# Altium PCB S52多功能板.PcbDoc (part 2 of 5)
Units mm, origin at the board's own origin, x right, y up, seen from the top; angles counter-clockwise.
Board outline 152.4 x 101.6 mm, 2 copper layers (Top Layer, Bottom Layer); 136 components, 143 nets, 561 pads, 46 vias.
Unrouted connection lines stored in the file: 1.
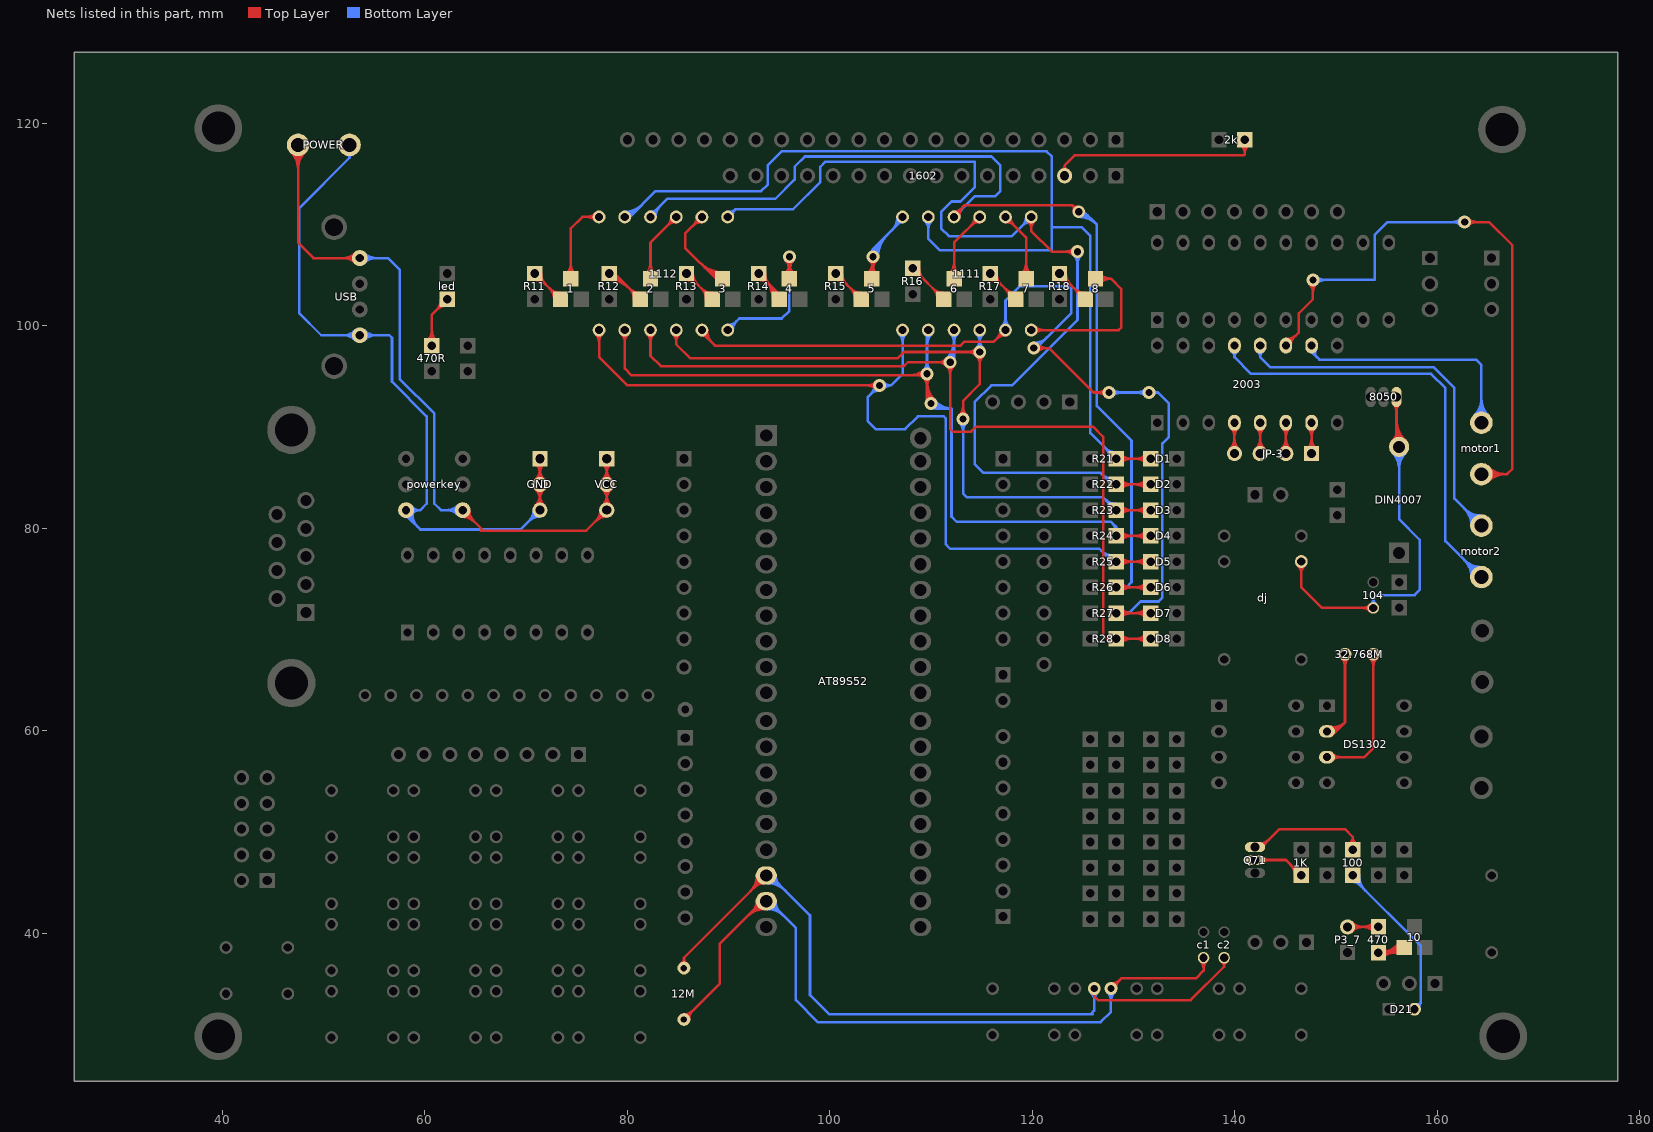
[diagram p2: the nets of this part, all layers, seen from the top]

## Via types
v1: diameter 1.27, hole 0.711, Top Layer to Bottom Layer, 46 vias

## Nets (pads, with @x,y where several pads share a name; then routed paths per layer and width w, separated by ;. In a path a pad name is that pad's centre, name@x,y a point inside that pad or via, vN(x,y) a via of type N, cw(c..) or ccw(c..) an arc to the next point about the centre after c; other vN are vias at no path point) (continued)
Net1_b: 1.B R11.2 | length 11.3
  Top Layer w0.254: R11.2@70.866,104.521 cw(c70.866,102.988) 71.95,104.072 cw(c73.034,105.156) R11.2@71.501,105.156 ; R11.2@70.866,104.775 cw(c70.866,103.855) 71.516,104.506 cw(c72.167,105.156) R11.2@71.247,105.156 ; R11.2@70.866,105.156 1.B@73.406,102.616 ; 1.B@72.771,102.616 ccw(c71.238,102.616) 72.322,103.7 ccw(c73.406,104.784) 1.B@73.406,103.251 ; 1.B@73.025,102.616 ccw(c72.105,102.616) 72.756,103.266 ccw(c73.406,103.917) 1.B@73.406,102.997
Net1_c: 1.C 1112.12 | length 14
  Top Layer w0.254: 1.C@73.973,105.097 ccw(c72.889,106.181) 74.422,106.181 ccw(c75.955,106.181) 1.C@74.871,105.097 ; 1.C@74.153,104.917 ccw(c73.502,105.568) 74.422,105.568 ccw(c75.342,105.568) 1.C@74.691,104.917 ; 1.C@74.422,104.648 74.422,109.601 75.565,110.744 1112.12@77.216,110.744 ; 1112.12@76.857,110.385 ccw(c75.99,109.518) 75.99,110.744 ccw(c75.99,111.97) 1112.12@76.857,111.103
Net1K_2: 1K.2 Q71.2 | length 10.5
  Top Layer w0.254: Q71.2@141.986,47.244 145.034,47.244 1K.2@146.558,45.72 ; Q71.2@142.75,46.98 cw(c143.386,46.344) 143.386,47.244 cw(c143.386,48.144) Q71.2@142.75,47.508 ; 1K.2@145.923,45.72 ccw(c144.39,45.72) 145.474,46.804 ccw(c146.558,47.888) 1K.2@146.558,46.355 ; 1K.2@146.177,45.72 ccw(c145.257,45.72) 145.908,46.37 ccw(c146.558,47.021) 1K.2@146.558,46.101
Net2_b: 2.B R12.2 | length 13
  Top Layer w0.254: R12.2@78.232,104.521 cw(c78.232,101.762) 80.183,103.713 ; R12.2@78.232,104.775 cw(c78.232,102.629) 79.75,104.146 ; R12.2@78.232,105.029 cw(c78.232,103.496) 79.316,104.58 ; R12.2@78.232,105.156 78.74,105.156 2.B@81.28,102.616 ; 2.B@80.645,102.616 ccw(c79.112,102.616) 80.196,103.7 ccw(c81.28,104.784) 2.B@81.28,103.251 ; 2.B@80.899,102.616 ccw(c79.979,102.616) 80.63,103.266 ccw(c81.28,103.917) 2.B@81.28,102.997
Net2_c: 2.C 1112.9 | length 12.9
  Top Layer w0.254: 2.C@81.847,105.097 ccw(c80.763,106.181) 82.296,106.181 ccw(c83.829,106.181) 2.C@82.745,105.097 ; 2.C@82.027,104.917 ccw(c81.376,105.568) 82.296,105.568 ccw(c83.216,105.568) 2.C@82.565,104.917 ; 2.C@82.296,104.648 82.296,108.204 1112.9@84.836,110.744 ; 1112.9@84.328,110.744 cw(c83.102,110.744) 83.969,109.877 cw(c84.836,109.01) 1112.9@84.836,110.236
Net2k_2: 2k.2 1602.3 | length 25.2
  Top Layer w0.254: 1602.3@122.907,115.363 ccw(c122.673,115.824) 123.19,115.824 ; 1602.3@123.19,114.808 123.19,115.824 ; 1602.3@123.473,115.363 cw(c123.707,115.824) 123.19,115.824 ; 2k.2@140.552,117.886 cw(c139.751,116.967) 140.97,116.967 ; 2k.2@140.719,118.077 cw(c140.239,117.526) 140.97,117.526 cw(c141.701,117.526) 2k.2@141.221,118.077 ; 2k.2@140.97,118.364 140.97,116.967 ; 2k.2@141.388,117.886 ccw(c142.189,116.967) 140.97,116.967 ; 123.19,115.824 124.206,116.84 140.917,116.84 140.97,116.967
Net3_b: 3.B R13.2 | length 11.3
  Top Layer w0.254: R13.2@85.852,104.521 cw(c85.852,102.988) 86.936,104.072 cw(c88.02,105.156) R13.2@86.487,105.156 ; R13.2@85.852,104.775 cw(c85.852,103.855) 86.502,104.506 cw(c87.153,105.156) R13.2@86.233,105.156 ; R13.2@85.852,105.156 3.B@88.392,102.616 ; 3.B@87.757,102.616 ccw(c86.224,102.616) 87.308,103.7 ccw(c88.392,104.784) 3.B@88.392,103.251 ; 3.B@88.011,102.616 ccw(c87.091,102.616) 87.742,103.266 ccw(c88.392,103.917) 3.B@88.392,102.997
Net3_c: 3.C 1112.8 | length 17.3
  Top Layer w0.254: 1112.8@86.868,110.744 cw(c85.642,110.744) 86.509,109.877 cw(c87.376,109.01) 1112.8@87.376,110.236 ; 87.24,106.181 ccw(c89.408,108.349) 3.C@89.408,105.283 ; 1112.8@87.376,110.744 85.725,109.093 85.725,107.696 88.773,104.648 3.C@89.408,104.648 ; 87.674,105.747 ccw(c89.408,107.482) 3.C@89.408,105.029 ; 88.107,105.314 ccw(c89.408,106.615) 3.C@89.408,104.775 ; 88.541,104.88 ccw(c89.408,105.747) 3.C@89.408,104.521
Net4_b: 4.B R14.2 | length 12.8
  Top Layer w0.254: R14.2@92.964,104.521 cw(c92.964,102.988) 94.048,104.072 cw(c95.132,105.156) R14.2@93.599,105.156 ; R14.2@92.964,104.648 R14.2@92.964,105.156 94.996,103.124 4.B@94.996,102.616 ; R14.2@92.964,104.775 cw(c92.964,103.855) 93.614,104.506 cw(c94.265,105.156) R14.2@93.345,105.156 ; R14.2@93.553,104.567 cw(c91.602,102.616) 4.B@94.361,102.616 ; 93.986,104.134 cw(c92.469,102.616) 4.B@94.615,102.616 ; 94.42,103.7 cw(c93.336,102.616) 4.B@94.869,102.616
Net4_c: 4.C 1112.6 | length 24
  Top Layer w0.254: 4.C@95.563,105.097 ccw(c94.479,106.181) 96.012,106.181 ccw(c97.545,106.181) 4.C@96.461,105.097 ; v1@95.653,106.448 cw(c94.786,105.581) 96.012,105.581 cw(c97.238,105.581) v1@96.371,106.448 ; 4.C@95.743,104.917 ccw(c95.092,105.568) 96.012,105.568 ccw(c96.932,105.568) 4.C@96.281,104.917 ; 4.C@96.012,104.648 v1(96.012,106.807)
  Bottom Layer w0.254: 1112.6@89.916,99.568 91.059,100.711 95.25,100.711 96.012,101.473 v1(96.012,106.807) ; 1112.6@89.916,100.076 ccw(c89.916,101.302) 90.783,100.435 ccw(c91.65,99.568) 1112.6@90.424,99.568 ; v1@95.653,106.448 cw(c94.786,105.581) 96.012,105.581 cw(c97.238,105.581) v1@96.371,106.448
Net5_b: 5.B R15.2 | length 11.3
  Top Layer w0.254: R15.2@100.584,104.521 cw(c100.584,102.988) 101.668,104.072 cw(c102.752,105.156) R15.2@101.219,105.156 ; R15.2@100.584,104.775 cw(c100.584,103.855) 101.234,104.506 cw(c101.885,105.156) R15.2@100.965,105.156 ; R15.2@100.584,105.156 5.B@103.124,102.616 ; 5.B@102.489,102.616 ccw(c100.956,102.616) 102.04,103.7 ccw(c103.124,104.784) 5.B@103.124,103.251 ; 5.B@102.743,102.616 ccw(c101.823,102.616) 102.474,103.266 ccw(c103.124,103.917) 5.B@103.124,102.997
Net5_c: 5.C 1111.12 | length 23
  Top Layer w0.254: 5.C@103.691,105.097 ccw(c102.3,106.488) v1@104.267,106.488 ; 5.C@103.871,104.917 ccw(c102.914,105.874) 104.267,105.874 ccw(c105.366,105.874) 5.C@104.589,105.097 ; v1@103.908,106.448 cw(c103.041,105.581) 104.267,105.581 cw(c105.493,105.581) v1@104.626,106.448 ; 5.C@104.267,104.775 v1(104.267,106.807)
  Bottom Layer w0.254: v1@104.013,106.807 cw(c105.239,106.807) 104.372,107.674 ; v1@104.072,107.276 ccw(c103.95,107.569) 104.267,107.569 ; v1@104.462,107.276 cw(c104.584,107.569) 104.267,107.569 ; v1@104.521,106.807 cw(c106.974,106.807) 105.239,108.541 ; v1@104.775,106.807 cw(c107.841,106.807) 105.673,108.975 ; 104.806,108.108 ccw(c106.107,106.807) v1(104.267,106.807) 104.267,107.569 ; 106.141,109.443 ccw(c104.84,110.744) 1111.12@106.68,110.744 ; 106.575,109.877 ccw(c105.708,110.744) 1111.12@106.934,110.744 ; 106.754,110.056 cw(c107.188,109.623) 1111.12@107.188,110.236 ; 1111.12@107.188,110.744 107.188,110.49 104.267,107.569
Net6_b: 6.B R16.2 | length 12
  Top Layer w0.254: R16.2@108.204,105.029 cw(c108.204,103.496) 109.288,104.58 cw(c110.372,105.664) R16.2@108.839,105.664 ; R16.2@108.204,105.283 cw(c108.204,104.363) 108.854,105.014 cw(c109.505,105.664) R16.2@108.585,105.664 ; R16.2@108.204,105.664 6.B@111.252,102.616 ; 6.B@110.617,102.616 ccw(c109.084,102.616) 110.168,103.7 ccw(c111.252,104.784) 6.B@111.252,103.251 ; 6.B@110.871,102.616 ccw(c109.951,102.616) 110.602,103.266 ccw(c111.252,103.917) 6.B@111.252,102.997
Net6_c: 6.C 1111.9 | length 12.9
  Top Layer w0.254: 6.C@111.819,105.097 ccw(c110.735,106.181) 112.268,106.181 ccw(c113.801,106.181) 6.C@112.717,105.097 ; 6.C@111.999,104.917 ccw(c111.348,105.568) 112.268,105.568 ccw(c113.188,105.568) 6.C@112.537,104.917 ; 6.C@112.268,104.648 112.268,108.204 1111.9@114.808,110.744 ; 1111.9@114.3,110.744 cw(c113.074,110.744) 113.941,109.877 cw(c114.808,109.01) 1111.9@114.808,110.236
Net7_b: 7.B R17.2 | length 11.3
  Top Layer w0.254: R17.2@115.824,104.521 cw(c115.824,102.988) 116.908,104.072 cw(c117.992,105.156) R17.2@116.459,105.156 ; R17.2@115.824,104.775 cw(c115.824,103.855) 116.474,104.506 cw(c117.125,105.156) R17.2@116.205,105.156 ; R17.2@115.824,105.156 7.B@118.364,102.616 ; 7.B@117.729,102.616 ccw(c116.196,102.616) 117.28,103.7 ccw(c118.364,104.784) 7.B@118.364,103.251 ; 7.B@117.983,102.616 ccw(c117.063,102.616) 117.714,103.266 ccw(c118.364,103.917) 7.B@118.364,102.997
Net7_c: 7.C 1111.8 | length 12.7
  Top Layer w0.254: 1111.8@117.348,110.236 cw(c117.348,109.01) 118.215,109.877 cw(c119.082,110.744) 1111.8@117.856,110.744 ; 1111.8@117.348,110.744 119.38,108.712 7.C@119.38,104.648 ; 7.C@118.931,105.097 ccw(c117.847,106.181) 119.38,106.181 ccw(c120.913,106.181) 7.C@119.829,105.097 ; 7.C@119.111,104.917 ccw(c118.46,105.568) 119.38,105.568 ccw(c120.3,105.568) 7.C@119.649,104.917
Net8_b: 8.B R18.2 | length 11.3
  Top Layer w0.254: R18.2@122.682,104.521 cw(c122.682,102.988) 123.766,104.072 cw(c124.85,105.156) R18.2@123.317,105.156 ; R18.2@122.682,104.775 cw(c122.682,103.855) 123.332,104.506 cw(c123.983,105.156) R18.2@123.063,105.156 ; R18.2@122.682,105.156 8.B@125.222,102.616 ; 8.B@124.587,102.616 ccw(c123.054,102.616) 124.138,103.7 ccw(c125.222,104.784) 8.B@125.222,103.251 ; 8.B@124.841,102.616 ccw(c123.921,102.616) 124.572,103.266 ccw(c125.222,103.917) 8.B@125.222,102.997
Net8_c: 8.C 1111.6 | length 21.5
  Top Layer w0.254: 1111.6@119.888,99.568 128.524,99.568 128.778,99.822 128.778,103.632 127.762,104.648 ; 1111.6@120.247,99.209 cw(c121.114,98.342) 121.114,99.568 cw(c121.114,100.794) 1111.6@120.247,99.927 ; 8.C@126.238,104.648 127.762,104.648 ; 8.C@126.509,104.38 cw(c127.152,103.741) 127.152,104.648 cw(c127.152,105.555) 8.C@126.509,104.916 ; 8.C@126.689,104.201 cw(c127.762,103.137) 127.762,104.648 ; 8.C@126.689,105.095 ccw(c127.762,106.159) 127.762,104.648
Net10_b: 10.B 470.1 | length 13.4
  Top Layer w0.254: 470.1@154.447,37.831 cw(c155.098,37.18) 155.098,38.1 cw(c155.098,39.02) 470.1@154.447,38.369 ; 470.1@154.627,37.651 cw(c155.711,36.567) 155.711,38.1 cw(c155.711,39.633) 470.1@154.627,38.549 ; 470.1@154.743,38.1 ccw(c154.743,40.358) 10.B@156.433,38.861 ; 155.307,38.1 ccw(c155.307,39.858) 10.B@156.623,38.692 ; 155.871,38.1 ccw(c155.871,39.358) 10.B@156.813,38.524 ; 10.B@156.243,39.029 cw(c154.178,40.858) 470.1@154.178,38.1 156.21,38.1 10.B@156.718,38.608
Net12M_1: 12M.1 AT89S52.19 c1.2 | length 90.4
  Top Layer w0.254: 12M.1@85.598,31.496 89.154,35.052 89.154,38.989 93.345,43.18 AT89S52.19@93.726,43.18 ; 12M.1@85.598,32.004 ccw(c85.598,33.23) 86.465,32.363 ccw(c87.332,31.496) 12M.1@86.106,31.496 ; 91.858,41.693 cw(c93.576,39.975) AT89S52.19@93.576,42.405 ; 92.292,42.127 cw(c93.576,40.842) AT89S52.19@93.576,42.659 ; 92.416,42.251 ccw(c91.486,43.18) AT89S52.19@92.801,43.18 ; 92.725,42.56 cw(c93.576,41.709) AT89S52.19@93.576,42.913 ; v1(127.762,34.544) 128.778,35.56 136.144,35.56 136.906,36.322 c1.2@136.906,37.592 ; v1@127.762,35.052 ccw(c127.762,36.278) 128.629,35.411 ccw(c129.496,34.544) v1@128.27,34.544 ; c1.2@136.592,37.278 cw(c135.833,36.519) 136.906,36.519 cw(c137.979,36.519) c1.2@137.22,37.278
  Bottom Layer w0.254: 12M.1@85.598,31.496 12M.1@85.979,31.496 ; AT89S52.19@93.726,43.18 93.98,43.18 96.647,40.513 96.647,33.401 98.806,31.242 126.746,31.242 127.762,32.258 v1(127.762,34.544) ; AT89S52.19@93.876,42.405 cw(c93.876,40.282) 95.377,41.783 ; AT89S52.19@93.876,42.659 cw(c93.876,41.149) 94.944,42.216 ; AT89S52.19@94.397,43.18 ccw(c95.405,43.18) 94.693,42.467 ; AT89S52.19@94.651,43.18 ccw(c96.272,43.18) 95.126,42.034 ; v1@127.403,34.185 cw(c126.536,33.318) 127.762,33.318 cw(c128.988,33.318) v1@128.121,34.185
Net12M_2: 12M.2 AT89S52.18 c2.2 | length 90.9
  Top Layer w0.254: 12M.2@85.293,36.982 ccw(c84.836,37.592) 85.598,37.592 ; 12M.2@85.598,36.576 85.598,37.592 ; 12M.2@85.903,36.982 cw(c86.36,37.592) 85.598,37.592 ; 92.146,44.14 ccw(c90.566,45.72) AT89S52.18@92.801,45.72 ; 92.508,44.502 cw(c93.576,43.435) AT89S52.18@93.576,44.945 ; 92.58,44.574 ccw(c91.434,45.72) AT89S52.18@93.055,45.72 ; 92.942,44.936 cw(c93.576,44.302) AT89S52.18@93.576,45.199 ; 93.013,45.007 ccw(c92.301,45.72) AT89S52.18@93.309,45.72 ; AT89S52.18@93.726,45.72 85.598,37.592 ; v1(126.111,34.544) 126.111,33.782 ; c2.2@138.671,37.236 cw(c138.271,36.703) 138.938,36.703 ; c2.2@138.938,37.592 138.938,36.703 ; c2.2@139.205,37.236 ccw(c139.605,36.703) 138.938,36.703 ; 126.111,33.782 ccw(c125.794,33.782) 125.916,34.075 cw(c125.794,33.782) 126.111,33.782 ; 126.111,33.782 cw(c126.428,33.782) 126.306,34.075 ccw(c126.428,33.782) 126.111,33.782 ; 126.111,33.782 126.492,33.401 135.636,33.401 138.938,36.703
  Bottom Layer w0.254: AT89S52.18@93.726,45.72 94.107,45.72 98.044,41.783 98.044,33.909 99.949,32.004 125.984,32.004 ; AT89S52.18@93.876,44.945 cw(c93.876,42.515) 95.594,44.233 ; AT89S52.18@93.876,45.199 cw(c93.876,43.382) 95.16,44.667 ; AT89S52.18@93.876,45.453 cw(c93.876,44.249) 94.727,45.1 ; AT89S52.18@94.651,45.72 ccw(c95.966,45.72) 95.036,44.791 ; 125.73,32.004 126.111,32.385 v1(126.111,34.544) ; v1@125.752,34.185 cw(c124.885,33.318) 126.111,33.318 cw(c127.337,33.318) v1@126.47,34.185
Net100_1: 100.1 D21.2 | length 21
  Bottom Layer w0.254: 100.1@151.638,45.085 cw(c151.638,44.165) 152.288,44.816 ; 100.1@151.638,45.72 151.638,45.466 158.369,38.735 158.369,33.147 ; 100.1@152.019,45.72 ccw(c153.552,45.72) 152.468,44.636 ; 100.1@152.273,45.72 ccw(c154.419,45.72) 152.902,44.202 ; D21.2@157.734,32.512 158.369,33.147 ; D21.2@157.857,33.005 ccw(c157.987,33.529) 158.369,33.147 ; D21.2@158.227,32.635 cw(c158.751,32.765) 158.369,33.147
Net100_2: 100.2 Q71.3 | length 15.6
  Top Layer w0.254: Q71.3@141.986,48.514 142.621,48.514 144.399,50.292 150.876,50.292 151.638,49.53 ; Q71.3@142.486,48.633 ccw(c142.486,49.246) 142.92,48.813 ; Q71.3@142.486,48.887 ccw(c142.486,50.113) 143.353,49.246 ; Q71.3@142.859,48.514 cw(c143.434,48.514) 143.027,48.92 ; 100.2@151.257,48.768 ccw(c150.686,49.53) 151.638,49.53 ; 100.2@151.638,48.26 151.638,49.53 ; 100.2@152.019,48.768 cw(c152.59,49.53) 151.638,49.53
Net104_2: 104.2 8050.3 DIN4007.1 dj.6 | length 54.8
  Top Layer w0.254: dj.6@146.199,76.349 cw(c145.332,75.482) 146.558,75.482 cw(c147.784,75.482) dj.6@146.917,76.349 ; dj.6@146.558,76.708 146.558,74.168 148.59,72.136 104.2@153.67,72.136 ; 104.2@153.356,71.822 ccw(c152.597,71.063) 152.597,72.136 ccw(c152.597,73.209) 104.2@153.356,72.45 ; DIN4007.1@155.593,88.651 ccw(c154.716,89.528) 155.956,89.528 ccw(c157.704,89.528) DIN4007.1@156.468,88.292 ; 8050.3@155.692,92.2 cw(c155.056,91.563) 155.956,91.563 cw(c156.856,91.563) 8050.3@156.22,92.2 ; 155.956,90.142 ccw(c158.318,90.142) DIN4007.1@156.648,88.472 ; 155.956,90.755 ccw(c158.931,90.755) DIN4007.1@156.827,88.651 ; 8050.3@155.956,92.964 155.956,88.288 DIN4007.1@156.21,88.034
  Bottom Layer w0.254: 104.2@153.403,72.492 ccw(c153.003,73.025) 153.67,73.025 ; 104.2@153.67,72.136 153.67,73.025 ; 104.2@153.937,72.492 cw(c154.337,73.025) 153.67,73.025 ; DIN4007.1@155.593,87.417 cw(c154.102,85.926) 156.21,85.926 cw(c158.318,85.926) DIN4007.1@156.827,87.417 ; DIN4007.1@155.772,87.596 cw(c154.716,86.54) 156.21,86.54 cw(c157.704,86.54) DIN4007.1@156.648,87.596 ; DIN4007.1@156.21,88.034 156.21,80.899 158.242,78.867 158.242,73.914 157.734,73.406 154.051,73.406 153.67,73.025
Net121_1: 32.768M.1 DS1302.3 | length 18
  Top Layer w0.254: DS1302.3@149.094,57.403 152.78,57.403 153.67,58.293 32.768M.1@153.67,67.564 ; DS1302.3@149.613,57.062 cw(c150.437,56.238) 150.437,57.403 cw(c150.437,58.568) DS1302.3@149.613,57.744 ; 32.768M.1@153.311,67.205 cw(c152.444,66.338) 153.67,66.338 cw(c154.896,66.338) 32.768M.1@154.029,67.205
Net121_2: 32.768M.2 DS1302.2 | length 16.3
  Top Layer w0.254: DS1302.2@149.094,59.943 149.986,59.943 ; DS1302.2@149.207,59.671 ccw(c149.382,60.402) 149.914,59.871 ; DS1302.2@149.266,59.918 ccw(c149.506,60.92) 150.234,60.191 ; DS1302.2@149.325,60.165 ccw(c149.631,61.437) 150.555,60.512 ; DS1302.2@149.385,60.412 ccw(c149.755,61.954) 150.876,60.833 ; DS1302.2@149.72,59.763 cw(c149.986,59.656) 149.986,59.943 ; DS1302.2@149.72,60.123 ccw(c149.986,60.23) 149.986,59.943 ; 32.768M.2@150.517,67.205 cw(c149.65,66.338) 150.876,66.338 cw(c152.102,66.338) 32.768M.2@151.235,67.205 ; 32.768M.2@150.876,67.564 150.876,60.833 ; 149.986,59.943 150.876,60.833
Net211_1: GND.1 GND.2 GND.3 POWER.2 powerkey.6 USB.1 | length 104.8
  Top Layer w0.254: GND.3@70.933,82.229 ccw(c69.87,83.292) 71.374,83.292 ccw(c72.878,83.292) GND.3@71.815,82.229 ; GND.2@70.933,83.887 cw(c69.87,82.824) 71.374,82.824 cw(c72.878,82.824) GND.2@71.815,83.887 ; GND.2@70.933,84.769 ccw(c69.87,85.832) 71.374,85.832 ccw(c72.878,85.832) GND.2@71.815,84.769 ; GND.1@70.933,86.427 cw(c69.87,85.364) 71.374,85.364 cw(c72.878,85.364) GND.1@71.815,86.427 ; GND.3@71.113,82.049 ccw(c70.483,82.679) 71.374,82.679 ccw(c72.265,82.679) GND.3@71.635,82.049 ; GND.2@71.113,84.067 cw(c70.483,83.437) 71.374,83.437 cw(c72.265,83.437) GND.2@71.635,84.067 ; GND.2@71.113,84.589 ccw(c70.483,85.219) 71.374,85.219 ccw(c72.265,85.219) GND.2@71.635,84.589 ; GND.1@71.113,86.607 cw(c70.483,85.977) 71.374,85.977 cw(c72.265,85.977) GND.1@71.635,86.607 ; GND.3@71.374,81.788 GND.1@71.374,86.868
  Bottom Layer w0.254: POWER.2@52.333,116.902 cw(c52.252,116.586) 52.578,116.586 ; POWER.2@52.578,117.856 52.578,116.586 ; POWER.2@52.823,116.902 ccw(c52.904,116.586) 52.578,116.586 ; USB.1@53.127,98.593 ccw(c52,97.466) 52,99.06 ccw(c52,100.654) USB.1@53.127,99.527 ; USB.1@53.307,98.773 ccw(c52.613,98.079) 52.613,99.06 ccw(c52.613,100.041) USB.1@53.307,99.347 ; USB.1@53.594,98.679 USB.1@53.594,99.06 ; USB.1@53.881,98.773 cw(c54.575,98.079) 54.575,99.06 cw(c54.575,100.041) USB.1@53.881,99.347 ; USB.1@54.061,98.593 cw(c55.188,97.466) 55.188,99.06 cw(c55.188,100.654) USB.1@54.061,99.527 ; powerkey.6@58.166,81.128 cw(c58.166,80.76) 58.426,81.02 ; powerkey.6@58.316,81.763 ccw(c59.365,81.585) 58.613,80.833 ; powerkey.6@58.48,81.53 cw(c59.026,81.082) 59.026,81.788 cw(c59.026,82.494) powerkey.6@58.48,82.046 ; powerkey.6@58.567,81.72 ccw(c59.96,81.485) 58.961,80.485 ; powerkey.6@58.676,81.369 cw(c59.563,80.641) 59.563,81.788 ; powerkey.6@58.676,82.207 ccw(c59.563,82.935) 59.563,81.788 ; powerkey.6@58.817,81.678 ccw(c60.556,81.384) 59.309,80.137 ; GND.3@70.751,81.788 cw(c69.247,81.788) 70.31,80.724 cw(c71.374,79.661) GND.3@71.374,81.165 ; GND.3@71.005,81.788 cw(c70.114,81.788) 70.744,81.158 cw(c71.374,80.528) GND.3@71.374,81.419 ; GND.3@71.374,81.788 69.469,79.883 59.563,79.883 58.166,81.28 powerkey.6@58.166,81.788 59.563,81.788 ; 52.578,116.586 47.625,111.633 47.625,101.219 49.784,99.06 56.515,99.06 56.769,98.806 56.769,94.488 60.198,91.059 60.198,82.423 59.563,81.788
Net211_4: POWER.1 powerkey.1 USB.4 VCC.1 VCC.2 VCC.3 | length 113.2
  Top Layer w0.254: POWER.1@46.802,117.16 cw(c45.12,115.478) 47.498,115.478 cw(c49.876,115.478) POWER.1@48.194,117.16 ; POWER.1@46.981,117.339 cw(c45.733,116.091) 47.498,116.091 cw(c49.263,116.091) POWER.1@48.015,117.339 ; POWER.1@47.161,117.519 cw(c46.346,116.704) 47.498,116.704 cw(c48.65,116.704) POWER.1@47.835,117.519 ; POWER.1@47.498,117.856 47.498,108.204 49.022,106.68 USB.4@53.594,106.68 ; USB.4@53.127,106.213 ccw(c52,105.086) 52,106.68 ccw(c52,108.274) USB.4@53.127,107.147 ; USB.4@53.307,106.393 ccw(c52.613,105.699) 52.613,106.68 ccw(c52.613,107.661) USB.4@53.307,106.967 ; powerkey.1@63.754,81.128 cw(c63.754,79.533) 64.881,80.661 cw(c66.009,81.788) powerkey.1@64.414,81.788 ; powerkey.1@63.754,81.382 cw(c63.754,80.4) 64.448,81.094 cw(c65.142,81.788) powerkey.1@64.16,81.788 ; powerkey.1@63.754,81.534 powerkey.1@63.754,81.788 65.786,79.756 ; 65.532,79.756 75.946,79.756 VCC.3@77.978,81.788 VCC.1@77.978,86.868 ; VCC.3@77.355,81.788 cw(c75.851,81.788) 76.914,80.724 cw(c77.978,79.661) VCC.3@77.978,81.165 ; VCC.3@77.537,82.229 ccw(c76.474,83.292) 77.978,83.292 ccw(c79.482,83.292) VCC.3@78.419,82.229 ; VCC.2@77.537,83.887 cw(c76.474,82.824) 77.978,82.824 cw(c79.482,82.824) VCC.2@78.419,83.887 ; VCC.2@77.537,84.769 ccw(c76.474,85.832) 77.978,85.832 ccw(c79.482,85.832) VCC.2@78.419,84.769 ; VCC.1@77.537,86.427 cw(c76.474,85.364) 77.978,85.364 cw(c79.482,85.364) VCC.1@78.419,86.427 ; VCC.3@77.609,81.788 cw(c76.718,81.788) 77.348,81.158 cw(c77.978,80.528) VCC.3@77.978,81.419 ; VCC.3@77.717,82.049 ccw(c77.087,82.679) 77.978,82.679 ccw(c78.869,82.679) VCC.3@78.239,82.049 ; VCC.2@77.717,84.067 cw(c77.087,83.437) 77.978,83.437 cw(c78.869,83.437) VCC.2@78.239,84.067 ; VCC.2@77.717,84.589 ccw(c77.087,85.219) 77.978,85.219 ccw(c78.869,85.219) VCC.2@78.239,84.589 ; VCC.1@77.717,86.607 cw(c77.087,85.977) 77.978,85.977 cw(c78.869,85.977) VCC.1@78.239,86.607
  Bottom Layer w0.254: USB.4@53.594,106.68 56.388,106.68 57.531,105.537 57.531,94.742 60.96,91.313 60.96,82.423 61.595,81.788 powerkey.1@63.754,81.788 ; USB.4@53.881,106.393 cw(c54.575,105.699) 54.575,106.68 cw(c54.575,107.661) USB.4@53.881,106.967 ; USB.4@54.061,106.213 cw(c55.188,105.086) 55.188,106.68 cw(c55.188,108.274) USB.4@54.061,107.147 ; powerkey.1@63.287,81.321 ccw(c62.16,80.194) 62.16,81.788 ccw(c62.16,83.382) powerkey.1@63.287,82.255 ; powerkey.1@63.467,81.501 ccw(c62.773,80.807) 62.773,81.788 ccw(c62.773,82.769) powerkey.1@63.467,82.075
Net470_2: 470.2 P3_7.2 | length 10.7
  Top Layer w0.254: P3_7.2@151.13,40.64 470.2@154.178,40.64 ; P3_7.2@151.391,40.379 cw(c152.021,39.749) 152.021,40.64 cw(c152.021,41.531) P3_7.2@151.391,40.901 ; P3_7.2@151.571,40.199 cw(c152.634,39.136) 152.634,40.64 cw(c152.634,42.144) P3_7.2@151.571,41.081 ; 470.2@153.729,40.191 ccw(c152.645,39.107) 152.645,40.64 ccw(c152.645,42.173) 470.2@153.729,41.089 ; 470.2@153.909,40.371 ccw(c153.258,39.72) 153.258,40.64 ccw(c153.258,41.56) 470.2@153.909,40.909
Net470R_1: 470R.1 led.2 | length 12.9
  Top Layer w0.254: 470R.1@60.257,98.493 ccw(c59.173,99.577) 60.706,99.577 ccw(c62.239,99.577) 470R.1@61.155,98.493 ; 470R.1@60.437,98.313 ccw(c59.786,98.964) 60.706,98.964 ccw(c61.626,98.964) 470R.1@60.975,98.313 ; 470R.1@60.706,98.044 60.706,101.092 led.2@62.23,102.616 ; led.2@61.595,102.616 cw(c60.062,102.616) 61.146,101.532 cw(c62.23,100.448) led.2@62.23,101.981 ; led.2@61.849,102.616 cw(c60.929,102.616) 61.58,101.966 cw(c62.23,101.315) led.2@62.23,102.235
Net1111_1: 1111.1 1112.1 D5.2 R25.2 | length 105.7
  Top Layer w0.254: 1112.1@76.857,99.209 cw(c75.99,98.342) 77.216,98.342 cw(c78.442,98.342) 1112.1@77.575,99.209 ; 1112.1@77.216,99.568 77.216,96.901 80.01,94.107 v1(104.902,94.107) ; v1@104.543,93.748 ccw(c103.676,92.881) 103.676,94.107 ccw(c103.676,95.333) v1@104.543,94.466 ; R25.2@128.27,76.708 D5.2@131.699,76.708 ; R25.2@128.539,76.439 cw(c129.19,75.788) 129.19,76.708 cw(c129.19,77.628) R25.2@128.539,76.977 ; R25.2@128.719,76.259 cw(c129.803,75.175) 129.803,76.708 cw(c129.803,78.241) R25.2@128.719,77.157 ; D5.2@131.25,76.259 ccw(c130.166,75.175) 130.166,76.708 ccw(c130.166,78.241) D5.2@131.25,77.157 ; D5.2@131.43,76.439 ccw(c130.779,75.788) 130.779,76.708 ccw(c130.779,77.628) D5.2@131.43,76.977
  Bottom Layer w0.254: v1@104.394,94.107 cw(c103.168,94.107) 104.035,93.24 cw(c104.902,92.373) v1@104.902,93.599 ; v1@105.279,93.767 cw(c106.045,93.075) 106.045,94.107 ; v1@105.279,94.447 ccw(c106.045,95.139) 106.045,94.107 ; 1111.1@106.829,99.209 cw(c105.962,98.342) 107.188,98.342 cw(c108.414,98.342) 1111.1@107.547,99.209 ; 1111.1@107.188,99.568 107.188,95.25 106.045,94.107 ; 126.81,77.787 ccw(c127.941,78.919) R25.2@128.177,77.336 ; 127.166,77.431 ccw(c128.034,78.298) R25.2@128.214,77.085 ; 127.455,77.142 cw(c127.022,76.708) R25.2@127.635,76.708 ; R25.2@127.523,77.074 ccw(c128.126,77.677) R25.2@128.251,76.834 ; R25.2@128.27,76.708 127.889,76.708 126.619,77.978 111.887,77.978 111.43,78.435 111.43,90.881 111.252,91.059 108.712,91.059 107.442,89.789 104.521,89.789 103.759,90.551 103.759,92.964 v1(104.902,94.107) 106.045,94.107
Net1111_2: 1111.2 1112.2 D4.2 R24.2 | length 108.1
  Top Layer w0.254: 1112.2@79.397,99.209 cw(c78.53,98.342) 79.756,98.342 cw(c80.982,98.342) 1112.2@80.115,99.209 ; 1112.2@79.756,99.568 79.756,95.758 80.391,95.123 109.474,95.123 v1(109.601,95.25) 109.601,92.71 v1(109.982,92.329) cw(c110.902,93.249) 109.601,93.249 ; 108.068,95.123 ccw(c108.068,96.783) v1@109.242,95.609 ; v1@109.421,95.43 cw(c108.681,96.17) 108.681,95.123 cw(c108.681,94.33) 109.242,94.891 cw(c108.375,94.024) 109.601,94.024 cw(c110.827,94.024) v1@109.96,94.891 ; 109.601,93.862 ccw(c111.515,93.862) v1@110.162,92.509 ; 109.601,94.475 ccw(c112.128,94.475) v1@110.341,92.688 ; R24.2@128.27,79.248 D4.2@131.699,79.248 ; R24.2@128.539,78.979 cw(c129.19,78.328) 129.19,79.248 cw(c129.19,80.168) R24.2@128.539,79.517 ; R24.2@128.719,78.799 cw(c129.803,77.715) 129.803,79.248 cw(c129.803,80.781) R24.2@128.719,79.697 ; D4.2@131.25,78.799 ccw(c130.166,77.715) 130.166,79.248 ccw(c130.166,80.781) D4.2@131.25,79.697 ; D4.2@131.43,78.979 ccw(c130.779,78.328) 130.779,79.248 ccw(c130.779,80.168) D4.2@131.43,79.517
  Bottom Layer w0.254: v1@109.242,95.609 ccw(c108.375,96.476) 109.601,96.476 ccw(c110.827,96.476) v1@109.96,95.609 ; 1111.2@109.369,99.209 cw(c108.808,98.648) 109.601,98.648 cw(c110.648,98.648) 1111.2@109.908,99.388 ; v1(109.601,95.25) 109.601,99.441 1111.2@109.728,99.568 ; 109.601,98.035 cw(c111.261,98.035) 1111.2@110.087,99.209 ; v1@109.779,92.177 ccw(c110.49,92.71) 110.49,91.821 ; v1@110.185,92.481 ccw(c111.506,93.472) 111.506,91.821 ; v1@110.201,91.871 cw(c110.31,91.641) 110.49,91.821 ; v1@110.388,92.634 ccw(c112.014,93.853) 112.014,91.821 ; v1@110.44,92.11 ccw(c110.67,92.001) 110.49,91.821 ; 110.998,91.821 cw(c110.998,93.091) v1(109.982,92.329) 110.49,91.821 ; 127.879,80.528 cw(c127.049,79.697) R24.2@128.151,79.292 ; R24.2@128.064,79.849 ccw(c127.965,80.137) 128.27,80.137 ; 128.16,80.247 cw(c127.459,79.546) R24.2@128.389,79.204 ; R24.2@128.27,79.248 128.27,80.137 ; R24.2@128.476,79.849 cw(c128.575,80.137) 128.27,80.137 ; 110.49,91.821 112.014,91.821 ; 112.014,91.821 112.014,81.153 112.522,80.645 127.762,80.645 128.27,80.137
Net1111_3: 1111.3 1112.3 D8.2 R28.2 | length 103.6
  Top Layer w0.254: 1112.3@81.937,99.209 cw(c81.07,98.342) 82.296,98.342 cw(c83.522,98.342) 1112.3@82.655,99.209 ; 1112.3@82.296,99.568 82.296,97.028 83.312,96.012 107.315,96.012 107.696,96.393 v1(111.887,96.393) 111.887,89.789 112.141,89.535 113.955,89.535 114.463,90.043 125.984,90.043 127,89.027 127,69.469 127.381,69.088 ; v1@111.528,96.752 cw(c110.661,97.619) 110.661,96.393 cw(c110.661,95.167) 111.528,96.034 cw(c110.661,95.167) 111.887,95.167 cw(c113.113,95.167) v1@112.246,96.034 ; R28.2@127.669,68.882 ccw(c127.381,68.783) 127.381,69.088 ; R28.2@127.669,69.294 cw(c127.381,69.393) 127.381,69.088 ; R28.2@128.539,68.819 cw(c129.19,68.168) 129.19,69.088 cw(c129.19,70.008) R28.2@128.539,69.357 ; R28.2@128.719,68.639 cw(c129.803,67.555) 129.803,69.088 cw(c129.803,70.621) R28.2@128.719,69.537 ; D8.2@131.25,68.639 ccw(c130.166,67.555) 130.166,69.088 ccw(c130.166,70.621) D8.2@131.25,69.537 ; D8.2@131.43,68.819 ccw(c130.779,68.168) 130.779,69.088 ccw(c130.779,70.008) D8.2@131.43,69.357 ; D8.2@131.699,69.088 127.381,69.088
  Bottom Layer w0.254: v1@111.528,96.752 ccw(c109.741,98.539) 112.268,98.539 ; v1@111.707,96.573 ccw(c110.354,97.926) 112.268,97.926 ; 1111.3@111.909,99.209 cw(c111.042,98.342) 112.268,98.342 cw(c113.494,98.342) 1111.3@112.627,99.209 ; 112.268,97.313 cw(c110.967,97.313) v1(111.887,96.393) 112.268,96.774 1111.3@112.268,99.568
Net1111_4: 1111.4 1112.4 D3.2 R23.2 | length 93.5
  Top Layer w0.254: 1112.4@84.477,99.209 cw(c83.61,98.342) 84.836,98.342 cw(c86.062,98.342) 1112.4@85.195,99.209 ; 1112.4@84.836,99.568 84.836,98.171 86.233,96.774 106.68,96.774 107.315,97.409 v1(114.808,97.409) 114.808,94.234 113.157,92.583 v1(113.157,90.805) ; v1@112.798,91.164 ccw(c111.931,92.031) 113.157,92.031 ccw(c114.383,92.031) v1@113.516,91.164 ; v1@114.449,97.768 cw(c113.582,98.635) 113.582,97.409 cw(c113.582,96.183) 114.449,97.05 cw(c113.582,96.183) 114.808,96.183 cw(c116.034,96.183) v1@115.167,97.05 ; R23.2@128.27,81.534 R23.2@128.27,81.788 D3.2@131.699,81.788 ; R23.2@128.539,81.519 cw(c129.19,80.868) 129.19,81.788 cw(c129.19,82.708) R23.2@128.539,82.057 ; R23.2@128.719,81.339 cw(c129.803,80.255) 129.803,81.788 cw(c129.803,83.321) R23.2@128.719,82.237 ; D3.2@131.25,81.339 ccw(c130.166,80.255) 130.166,81.788 ccw(c130.166,83.321) D3.2@131.25,82.237 ; D3.2@131.43,81.519 ccw(c130.779,80.868) 130.779,81.788 ccw(c130.779,82.708) D3.2@131.43,82.057
  Bottom Layer w0.254: v1@112.798,90.446 cw(c111.931,89.579) 113.157,89.579 cw(c114.383,89.579) v1@113.516,90.446 ; v1(113.157,90.805) 113.157,83.439 113.538,83.058 127,83.058 R23.2@128.27,81.788 ; v1@114.449,97.768 ccw(c113.582,98.635) 114.808,98.635 ccw(c116.034,98.635) v1@115.167,97.768 ; 1111.4@114.449,99.209 cw(c113.582,98.342) 114.808,98.342 cw(c116.034,98.342) 1111.4@115.167,99.209 ; v1(114.808,97.409) 1111.4@114.808,99.568 ; R23.2@127.635,81.788 ccw(c126.102,81.788) 127.186,82.872 ccw(c128.27,83.956) R23.2@128.27,82.423 ; R23.2@127.889,81.788 ccw(c126.969,81.788) 127.62,82.438 ccw(c128.27,83.089) R23.2@128.27,82.169
Net1111_5: 1111.5 1112.5 D7.2 R27.2 | length 120.5
  Top Layer w0.254: 1112.5@87.376,99.06 cw(c87.376,98.447) 87.81,98.88 ; 1112.5@87.376,99.568 87.376,99.314 88.646,98.044 112.903,98.044 113.284,98.425 116.205,98.425 1111.5@117.348,99.568 ; 1112.5@87.63,99.568 ccw(c88.856,99.568) 87.989,98.701 ; 1112.5@87.884,99.568 ccw(c89.724,99.568) 88.423,98.267 ; 1111.5@116.84,99.568 cw(c115.614,99.568) 116.481,98.701 cw(c117.348,97.834) 1111.5@117.348,99.06 ; v1(120.142,97.79) 121.666,97.79 126.047,93.408 v1(127.572,93.408) ; v1@120.501,97.431 cw(c121.368,96.564) 121.368,97.79 cw(c121.368,99.016) v1@120.501,98.149 ; v1@127.212,93.049 ccw(c126.345,92.182) 126.345,93.408 ccw(c126.345,94.635) v1@127.212,93.768 ; R27.2@128.27,71.628 D7.2@131.699,71.628 ; R27.2@128.539,71.359 cw(c129.19,70.708) 129.19,71.628 cw(c129.19,72.548) R27.2@128.539,71.897 ; R27.2@128.719,71.179 cw(c129.803,70.095) 129.803,71.628 cw(c129.803,73.161) R27.2@128.719,72.077 ; D7.2@131.25,71.179 ccw(c130.166,70.095) 130.166,71.628 ccw(c130.166,73.161) D7.2@131.25,72.077 ; D7.2@131.43,71.359 ccw(c130.779,70.708) 130.779,71.628 ccw(c130.779,72.548) D7.2@131.43,71.897
  Bottom Layer w0.254: 1111.5@116.989,99.927 ccw(c116.122,100.794) 117.348,100.794 ccw(c118.574,100.794) 1111.5@117.707,99.927 ; 1111.5@117.348,99.568 117.348,102.489 118.745,103.886 123.571,103.886 123.825,103.632 123.825,101.219 120.396,97.79 v1(120.142,97.79) ; v1@120.142,98.044 ccw(c120.142,99.27) 121.009,98.403 ; v1@120.142,98.298 ccw(c120.142,100.138) 121.443,98.837 ; v1@120.65,97.79 cw(c121.263,97.79) 120.83,98.224 ; v1(127.572,93.408) 132.398,93.408 ; v1@127.931,93.049 cw(c128.798,92.182) 128.798,93.408 cw(c128.798,94.635) v1@127.931,93.768 ; R27.2@128.27,71.628 129.54,71.628 ; R27.2@128.778,71.247 cw(c129.54,70.676) 129.54,71.628 ; R27.2@128.778,72.009 ccw(c129.54,72.58) 129.54,71.628 ; v1@131.149,93.049 ccw(c130.282,92.182) 130.282,93.408 ccw(c130.282,94.635) v1@131.149,93.768 ; v1@131.946,93.151 cw(c132.397,92.885) 132.397,93.408 ; v1@131.946,93.666 ccw(c132.397,93.932) 132.397,93.408 ; 129.54,71.628 130.683,72.771 132.461,72.771 132.842,73.152 132.842,88.392 133.477,89.027 133.477,92.329 132.398,93.408
  other v1: 131.508,93.408
Net1111_7: 1111.7 1112.7 D2.2 R22.2 | length 117.2
  Top Layer w0.254: 1111.7@119.529,110.385 cw(c118.662,109.518) 119.888,109.518 cw(c121.114,109.518) 1111.7@120.247,110.385 ; 1111.7@119.888,110.744 119.888,109.347 121.92,107.315 v1(124.46,107.315) ; v1@124.101,106.956 ccw(c123.234,106.089) 123.234,107.315 ccw(c123.234,108.541) v1@124.101,107.674 ; R22.2@128.27,84.328 D2.2@131.699,84.328 ; R22.2@128.539,84.059 cw(c129.19,83.408) 129.19,84.328 cw(c129.19,85.248) R22.2@128.539,84.597 ; R22.2@128.719,83.879 cw(c129.803,82.795) 129.803,84.328 cw(c129.803,85.861) R22.2@128.719,84.777 ; D2.2@131.25,83.879 ccw(c130.166,82.795) 130.166,84.328 ccw(c130.166,85.861) D2.2@131.25,84.777 ; D2.2@131.43,84.059 ccw(c130.779,83.408) 130.779,84.328 ccw(c130.779,85.248) D2.2@131.43,84.597
  Bottom Layer w0.254: 1112.7@89.916,110.744 90.678,111.506 ; 1112.7@89.965,111.25 ccw(c90.049,112.135) 90.678,111.506 ; 1112.7@90.422,110.793 cw(c91.307,110.877) 90.678,111.506 ; 1111.7@119.38,110.744 cw(c118.154,110.744) 119.021,109.877 cw(c119.888,109.01) 1111.7@119.888,110.236 ; 1111.7@119.888,110.744 117.983,108.839 111.76,108.839 110.998,109.601 110.998,111.252 112.014,112.268 112.903,112.268 114.3,113.665 114.3,116.205 99.568,116.205 99.06,115.697 99.06,114.173 96.393,111.506 90.678,111.506 ; v1@124.101,106.956 cw(c123.234,106.089) 124.46,106.089 cw(c125.686,106.089) v1@124.819,106.956 ; v1(124.46,107.315) 124.46,100.584 117.983,94.107 115.951,94.107 114.3,92.456 114.3,86.36 115.189,85.471 126.746,85.471 127.889,84.328 R22.2@128.27,84.328 ; 126.937,85.28 ccw(c127.829,86.173) R22.2@128.122,84.946 ; 127.258,84.959 ccw(c127.953,85.655) R22.2@128.181,84.699 ; 127.455,84.762 cw(c127.022,84.328) R22.2@127.635,84.328
Net1111_10: 1111.10 1112.10 D6.2 R26.2 | length 125.2
  Top Layer w0.254: 1111.10@112.268,110.744 112.268,110.871 113.284,111.887 123.952,111.887 ; 1111.10@112.268,111.252 ccw(c112.268,112.172) 112.918,111.521 ; 1111.10@112.522,110.744 cw(c113.442,110.744) 112.791,111.394 ; 1111.10@112.776,110.744 cw(c114.309,110.744) 113.225,111.828 ; v1@124.094,111.375 ccw(c123.57,111.505) 123.952,111.887 ; v1@124.464,111.745 cw(c124.334,112.269) 123.952,111.887 ; v1(124.587,111.252) 123.952,111.887 ; R26.2@128.27,74.168 D6.2@131.699,74.168 ; R26.2@128.539,73.899 cw(c129.19,73.248) 129.19,74.168 cw(c129.19,75.088) R26.2@128.539,74.437 ; R26.2@128.719,73.719 cw(c129.803,72.635) 129.803,74.168 cw(c129.803,75.701) R26.2@128.719,74.617 ; D6.2@131.25,73.719 ccw(c130.166,72.635) 130.166,74.168 ccw(c130.166,75.701) D6.2@131.25,74.617 ; D6.2@131.43,73.899 ccw(c130.779,73.248) 130.779,74.168 ccw(c130.779,75.088) D6.2@131.43,74.437
  Bottom Layer w0.254: 1112.10@82.296,110.744 82.296,110.871 83.947,112.522 94.615,112.522 96.52,114.427 96.52,115.697 97.536,116.713 115.951,116.713 116.84,115.824 116.84,113.284 116.332,112.776 114.3,112.776 1111.10@112.268,110.744 ; 1112.10@82.296,111.252 ccw(c82.296,112.172) 82.946,111.521 ; 1112.10@82.55,110.744 cw(c83.47,110.744) 82.819,111.394 ; 1112.10@82.804,110.744 cw(c84.337,110.744) 83.253,111.828 ; 1111.10@112.268,111.252 ccw(c112.268,112.478) 113.135,111.611 ccw(c114.002,110.744) 1111.10@112.776,110.744 ; v1@124.587,110.744 cw(c124.587,108.291) 126.321,110.026 ; v1@124.587,110.998 cw(c124.587,109.158) 125.888,110.459 ; 125.454,110.893 ccw(c124.587,110.026) v1(124.587,111.252) 125.095,111.252 126.365,109.982 126.365,92.075 129.794,88.646 129.794,74.676 129.286,74.168 ; R26.2@128.27,74.168 129.286,74.168 ; R26.2@128.841,73.89 cw(c129.286,73.673) 129.286,74.168 ; R26.2@128.841,74.446 ccw(c129.286,74.663) 129.286,74.168
Net1111_11: 1111.11 1112.11 D1.2 R21.2 | length 118.7
  Top Layer w0.254: R21.2@128.27,86.868 D1.2@131.699,86.868 ; R21.2@128.539,86.599 cw(c129.19,85.948) 129.19,86.868 cw(c129.19,87.788) R21.2@128.539,87.137 ; R21.2@128.719,86.419 cw(c129.803,85.335) 129.803,86.868 cw(c129.803,88.401) R21.2@128.719,87.317 ; D1.2@131.25,86.419 ccw(c130.166,85.335) 130.166,86.868 ccw(c130.166,88.401) D1.2@131.25,87.317 ; D1.2@131.43,86.599 ccw(c130.779,85.948) 130.779,86.868 ccw(c130.779,87.788) D1.2@131.43,87.137
  Bottom Layer w0.254: 1112.11@79.756,110.998 ccw(c79.756,112.838) 81.057,111.537 ; 1112.11@79.756,111.252 ccw(c79.756,113.705) 81.49,111.97 ; 80.623,111.103 cw(c79.756,111.97) 1112.11@79.756,110.744 80.264,110.744 82.804,113.284 93.218,113.284 93.853,113.919 93.853,115.824 95.25,117.221 121.412,117.221 121.92,116.713 121.92,107.442 110.871,107.442 109.728,108.585 1111.11@109.728,110.744 ; 1111.11@109.369,110.385 cw(c108.502,109.518) 109.728,109.518 cw(c110.954,109.518) 1111.11@110.087,110.385 ; 121.92,109.728 124.841,109.728 125.73,108.839 125.73,89.408 R21.2@128.27,86.868 ; R21.2@127.635,86.868 ccw(c126.102,86.868) 127.186,87.952 ccw(c128.27,89.036) R21.2@128.27,87.503 ; R21.2@127.889,86.868 ccw(c126.969,86.868) 127.62,87.518 ccw(c128.27,88.169) R21.2@128.27,87.249
Net2003_4: 2003.4 JP-3.4 | length 8.7
  Top Layer w0.254: JP-3.4@139.513,87.817 ccw(c138.45,88.88) 139.954,88.88 ccw(c141.458,88.88) JP-3.4@140.395,87.817 ; 2003.4@139.603,89.906 cw(c138.755,89.058) 139.954,89.058 ; JP-3.4@139.693,87.637 ccw(c139.063,88.267) 139.954,88.267 ccw(c140.845,88.267) JP-3.4@140.215,87.637 ; JP-3.4@139.954,87.376 2003.4@139.955,90.42 2003.4@139.955,90.42 ; 139.954,89.053 cw(c141.16,89.053) 2003.4@140.307,89.906
Net2003_5: 2003.5 JP-3.3 | length 8.7
  Top Layer w0.254: JP-3.3@142.053,87.817 ccw(c140.987,88.883) 142.495,88.883 ; 2003.5@142.143,89.906 cw(c141.293,89.056) 142.495,89.056 cw(c143.697,89.056) 2003.5@142.847,89.906 ; JP-3.3@142.233,87.637 ccw(c141.601,88.269) 142.495,88.269 ; JP-3.3@142.494,87.376 JP-3.3@142.494,87.376 2003.5@142.495,90.42 ; 142.495,88.264 ccw(c143.382,88.264) JP-3.3@142.755,87.637 ; 142.495,88.878 ccw(c143.996,88.878) JP-3.3@142.935,87.817
Net2003_6: 2003.6 JP-3.2 | length 8.7
  Top Layer w0.254: JP-3.2@144.593,87.817 ccw(c143.527,88.883) 145.035,88.883 ; 2003.6@144.683,89.906 cw(c143.833,89.056) 145.035,89.056 cw(c146.237,89.056) 2003.6@145.387,89.906 ; JP-3.2@144.773,87.637 ccw(c144.141,88.269) 145.035,88.269 ; JP-3.2@145.034,87.376 JP-3.2@145.034,87.376 2003.6@145.035,90.42 ; 145.035,88.264 ccw(c145.922,88.264) JP-3.2@145.295,87.637 ; 145.035,88.878 ccw(c146.536,88.878) JP-3.2@145.475,87.817
Net2003_7: 2003.7 JP-3.1 | length 8.7
  Top Layer w0.254: JP-3.1@147.133,87.817 ccw(c146.067,88.883) 147.575,88.883 ; 2003.7@147.223,89.906 cw(c146.373,89.056) 147.575,89.056 cw(c148.777,89.056) 2003.7@147.927,89.906 ; JP-3.1@147.313,87.637 ccw(c146.681,88.269) 147.575,88.269 ; JP-3.1@147.574,87.376 JP-3.1@147.574,87.376 2003.7@147.575,90.42 ; 147.575,88.264 ccw(c148.462,88.264) JP-3.1@147.835,87.637 ; 147.575,88.878 ccw(c149.076,88.878) JP-3.1@148.015,87.817
Net2003_10: 2003.10 motor1.2 | length 33.5
  Bottom Layer w0.254: 2003.10@147.575,98.04 147.575,97.408 148.336,96.647 163.83,96.647 164.338,96.139 motor1.2@164.338,90.424 ; 2003.10@147.786,97.755 ccw(c148.242,97.488) 147.868,97.115 ; 2003.10@148.005,97.627 ccw(c148.536,97.317) 148.101,96.882 ; motor1.2@163.642,91.12 ccw(c161.96,92.802) 164.338,92.802 ccw(c166.716,92.802) motor1.2@165.034,91.12 ; motor1.2@163.821,90.941 ccw(c162.573,92.189) 164.338,92.189 ccw(c166.103,92.189) motor1.2@164.855,90.941 ; motor1.2@164.001,90.761 ccw(c163.186,91.576) 164.338,91.576 ccw(c165.49,91.576) motor1.2@164.675,90.761
Net2003_11: 2003.11 motor1.1 | length 77.7
  Top Layer w0.254: 2003.11@145.035,98.04 146.304,99.309 146.304,101.219 147.701,102.616 v1(147.701,104.521) ; 2003.11@145.035,98.447 ccw(c145.035,99.428) 145.729,98.734 ; 2003.11@145.035,98.701 ccw(c145.035,100.295) 146.162,99.168 ; 2003.11@145.533,98.203 cw(c146.343,98.203) 145.77,98.776 ; v1@147.342,104.162 cw(c146.475,103.295) 147.701,103.295 cw(c148.927,103.295) v1@148.06,104.162 ; v1(162.687,110.236) 165.1,110.236 167.386,107.95 167.386,85.852 166.878,85.344 motor1.1@164.338,85.344 ; v1@163.046,109.877 cw(c163.913,109.01) 163.913,110.236 cw(c163.913,111.462) v1@163.046,110.595 ; motor1.1@164.675,85.007 cw(c165.49,84.192) 165.49,85.344 cw(c165.49,86.496) motor1.1@164.675,85.681 ; motor1.1@164.855,84.827 cw(c166.103,83.579) 166.103,85.344 cw(c166.103,87.109) motor1.1@164.855,85.861 ; motor1.1@165.034,84.648 cw(c166.716,82.966) 166.716,85.344 cw(c166.716,87.722) motor1.1@165.034,86.04
  Bottom Layer w0.254: 2003.11@145.035,98.04 2003.11@145.035,98.553 ; v1(147.701,104.521) 153.797,104.521 153.797,108.966 155.067,110.236 v1(162.687,110.236) ; v1@148.06,104.162 cw(c148.927,103.295) 148.927,104.521 cw(c148.927,105.747) v1@148.06,104.88 ; v1@162.328,109.877 ccw(c161.461,109.01) 161.461,110.236 ccw(c161.461,111.462) v1@162.328,110.595
Net2003_12: 2003.12 motor2.2 | length 45.9
  Bottom Layer w0.254: 2003.12@142.202,97.475 cw(c141.784,96.9) 142.495,96.9 ; 2003.12@142.495,98.04 142.495,96.9 ; 2003.12@142.788,97.475 ccw(c143.206,96.9) 142.495,96.9 ; motor2.2@163.353,80.264 ccw(c160.975,80.264) 162.657,81.945 ccw(c164.338,83.627) motor2.2@164.338,81.249 ; motor2.2@163.607,80.264 ccw(c161.842,80.264) 163.09,81.512 ccw(c164.338,82.76) motor2.2@164.338,80.995 ; motor2.2@163.861,80.264 ccw(c162.709,80.264) 163.524,81.078 ccw(c164.338,81.893) motor2.2@164.338,80.741 ; motor2.2@164.338,80.264 161.671,82.931 161.671,93.853 159.639,95.885 143.51,95.885 142.495,96.9
Net2003_13: 2003.13 motor2.1 | length 53
  Bottom Layer w0.254: 2003.13@139.662,97.475 cw(c139.244,96.9) 139.955,96.9 ; 2003.13@139.955,98.04 139.955,96.9 ; 2003.13@140.248,97.475 ccw(c140.666,96.9) 139.955,96.9 ; motor2.1@163.353,75.184 ccw(c160.975,75.184) 162.657,76.865 ccw(c164.338,78.547) motor2.1@164.338,76.169 ; motor2.1@163.607,75.184 ccw(c161.842,75.184) 163.09,76.432 ccw(c164.338,77.68) motor2.1@164.338,75.915 ; motor2.1@163.861,75.184 ccw(c162.709,75.184) 163.524,75.998 ccw(c164.338,76.813) motor2.1@164.338,75.661 ; motor2.1@164.338,75.184 160.782,78.74 160.782,93.853 159.385,95.25 141.605,95.25 139.955,96.9